# Altium PCB ESP32-S2-Ink.PcbDoc
Units mm, origin at the board's own origin, x right, y up, seen from the top; angles counter-clockwise.
Board outline 35.56 x 17.78 mm, 6 copper layers (Top Layer 1, GND 1, PWR, L4, L5, Bottom Layer 1), stack 0.816 mm thick; 51 components, 57 nets, 221 pads, 105 vias.
Unrouted connection lines stored in the file: 8.
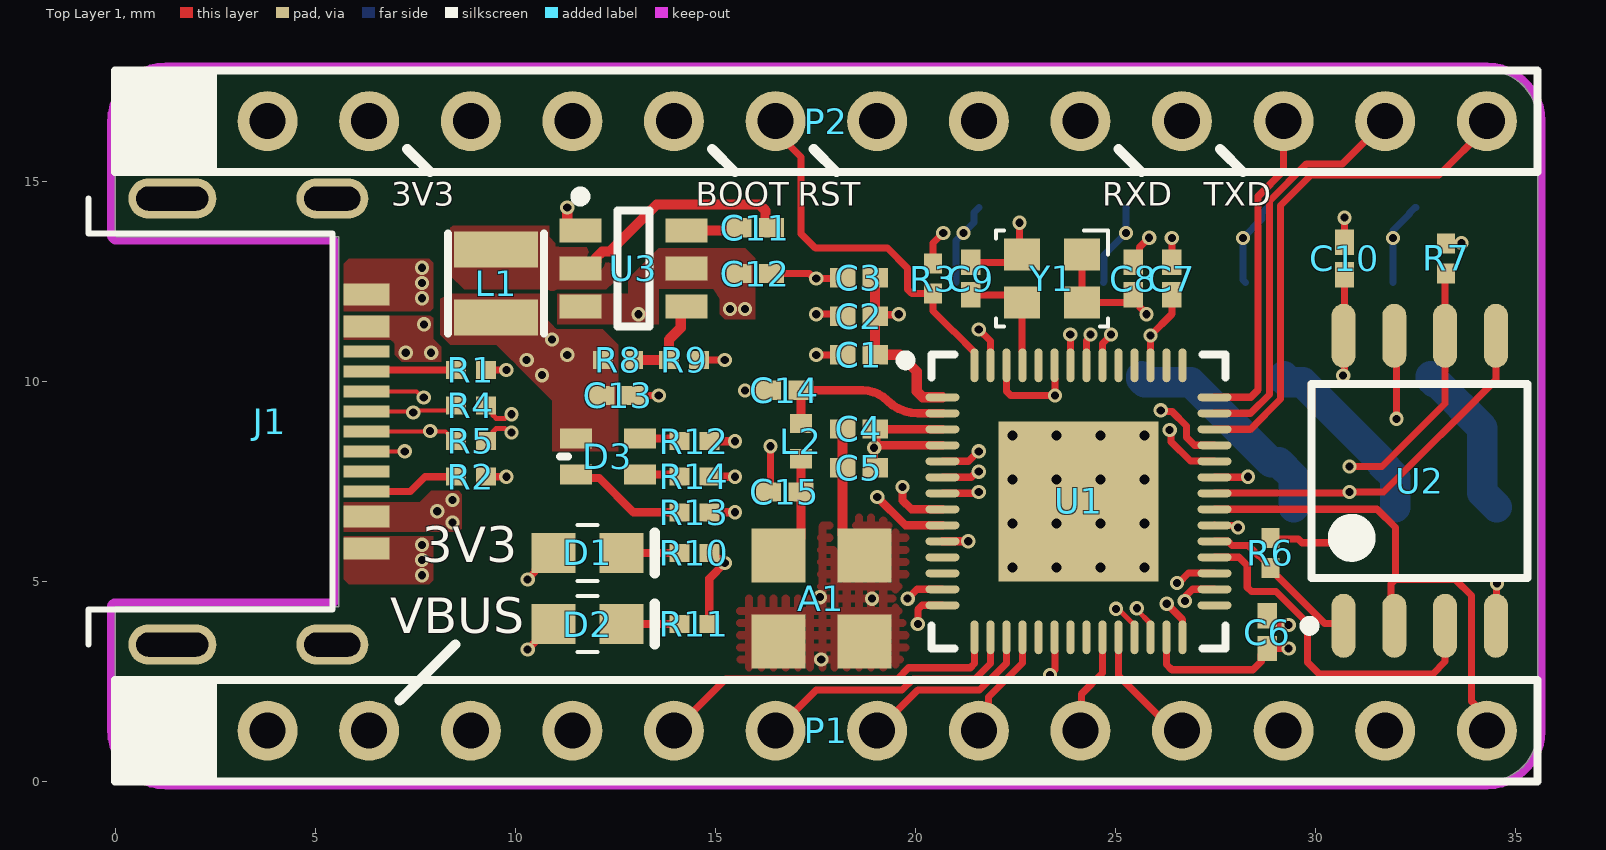
[diagram p0: Top Layer 1 view]
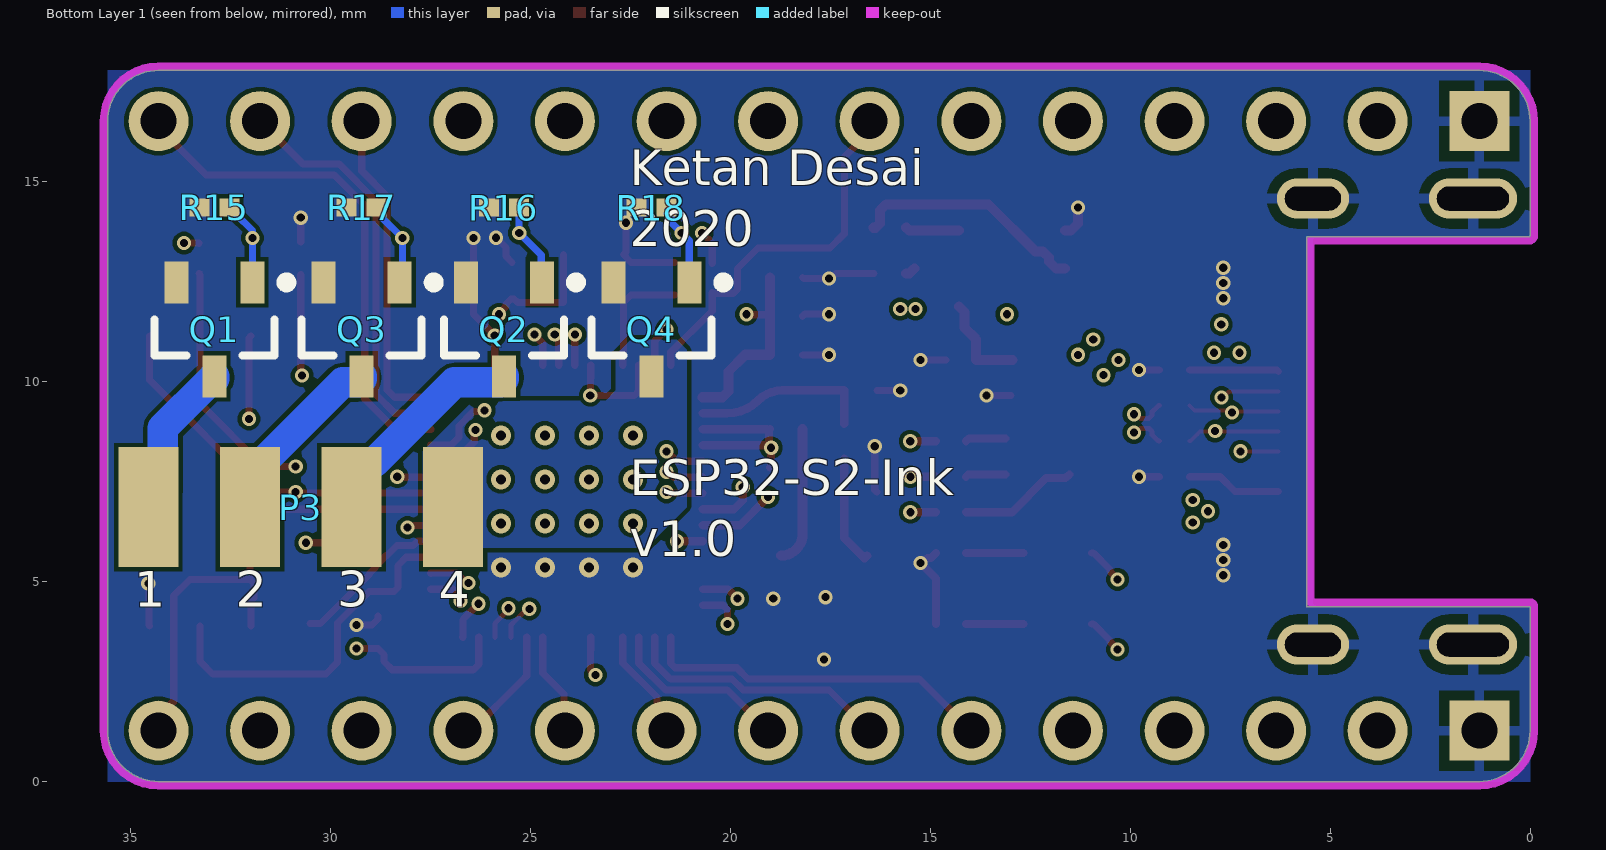
[diagram p1: Bottom Layer 1 view, seen from below]
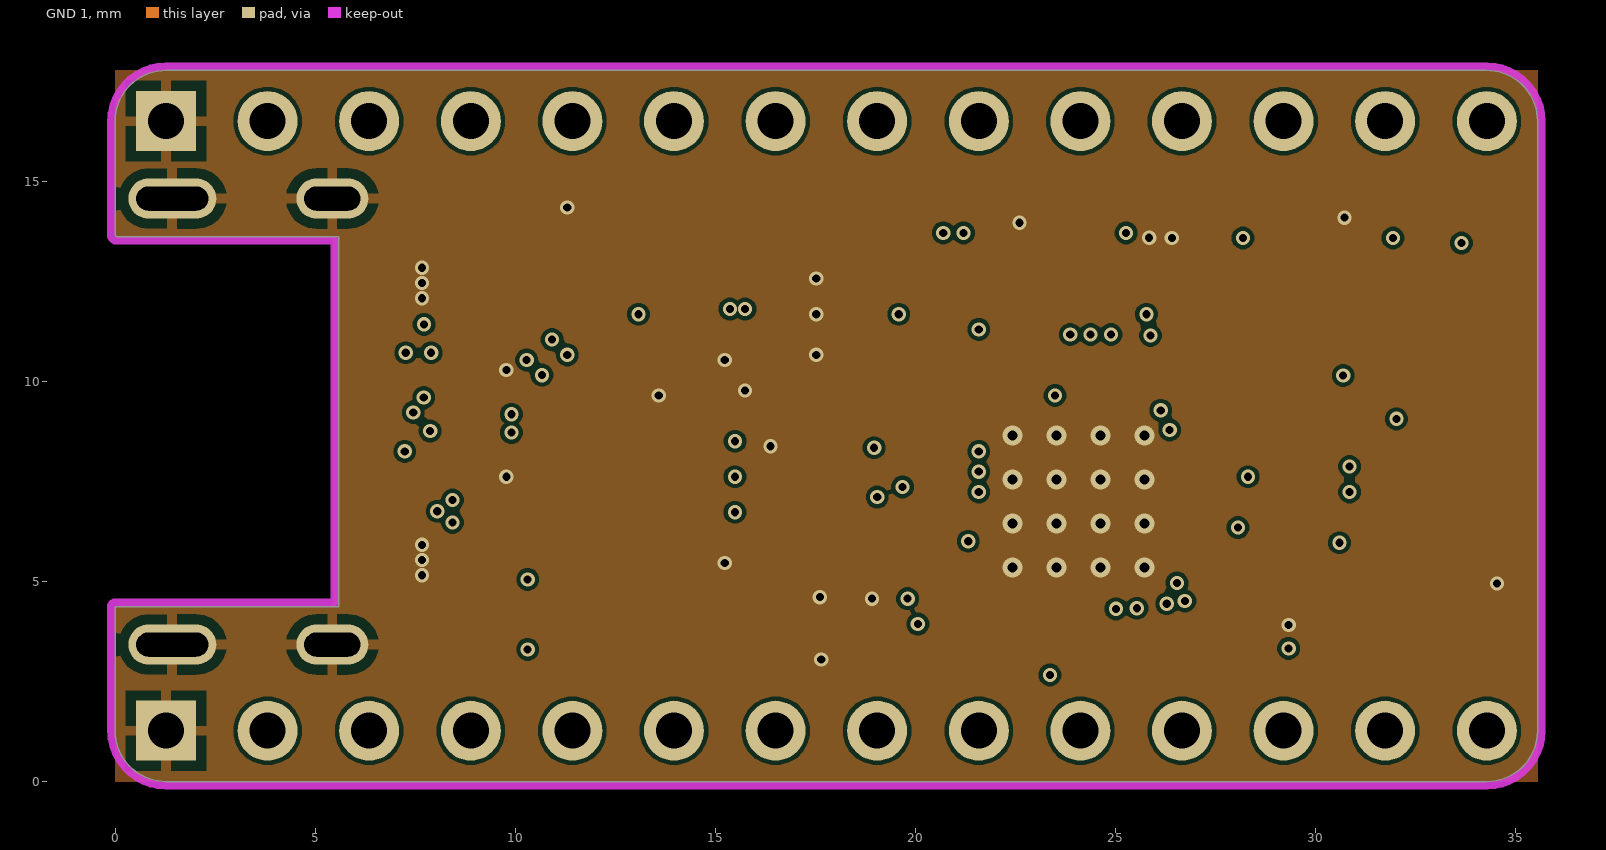
[diagram p2: GND 1]
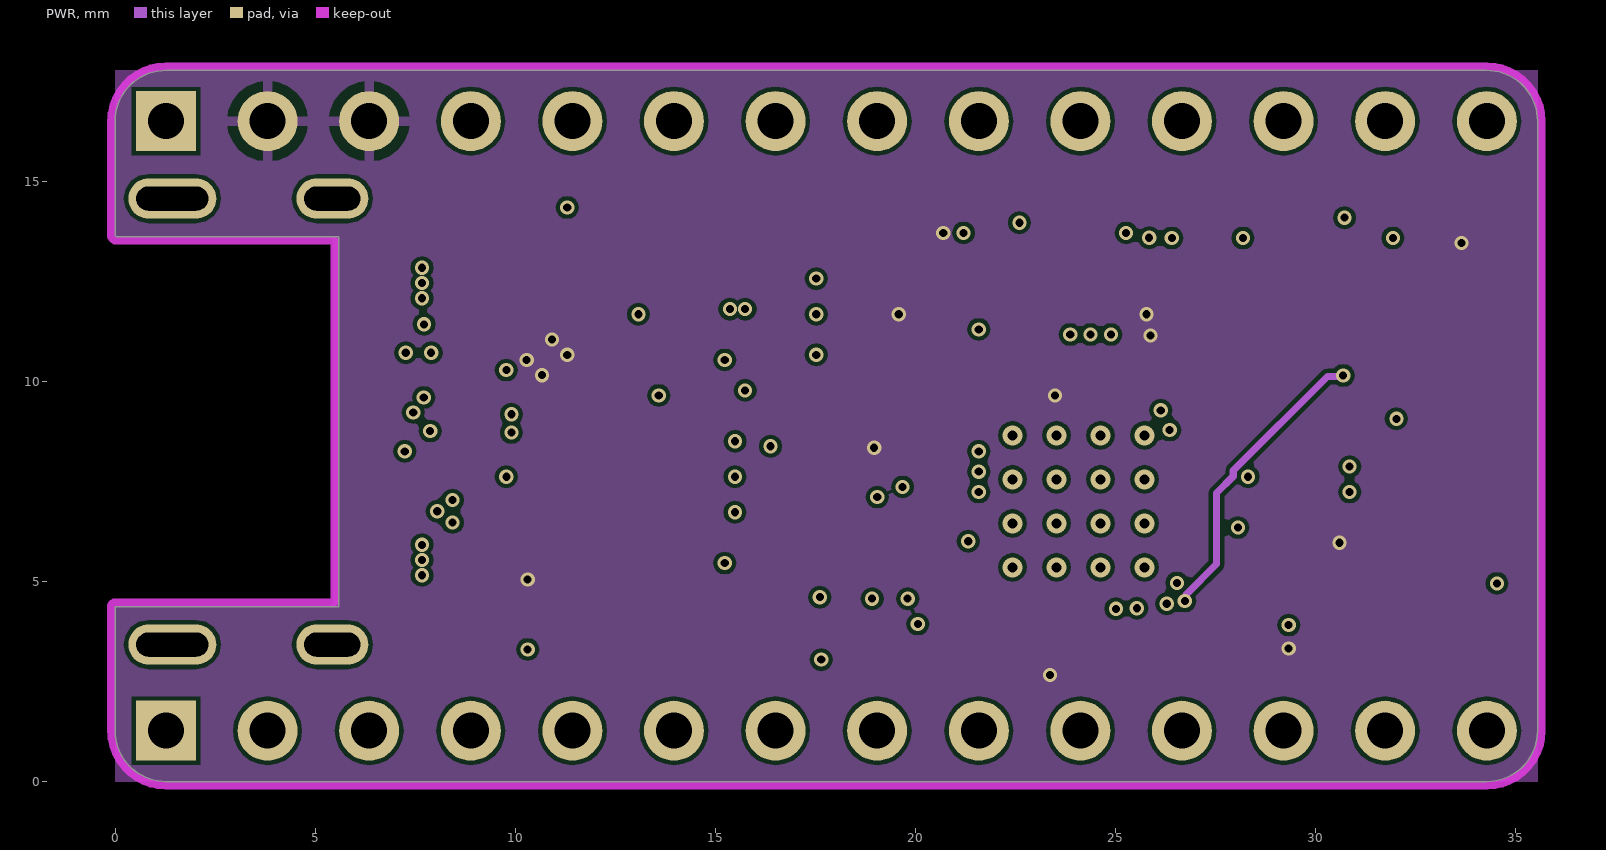
[diagram p3: PWR]
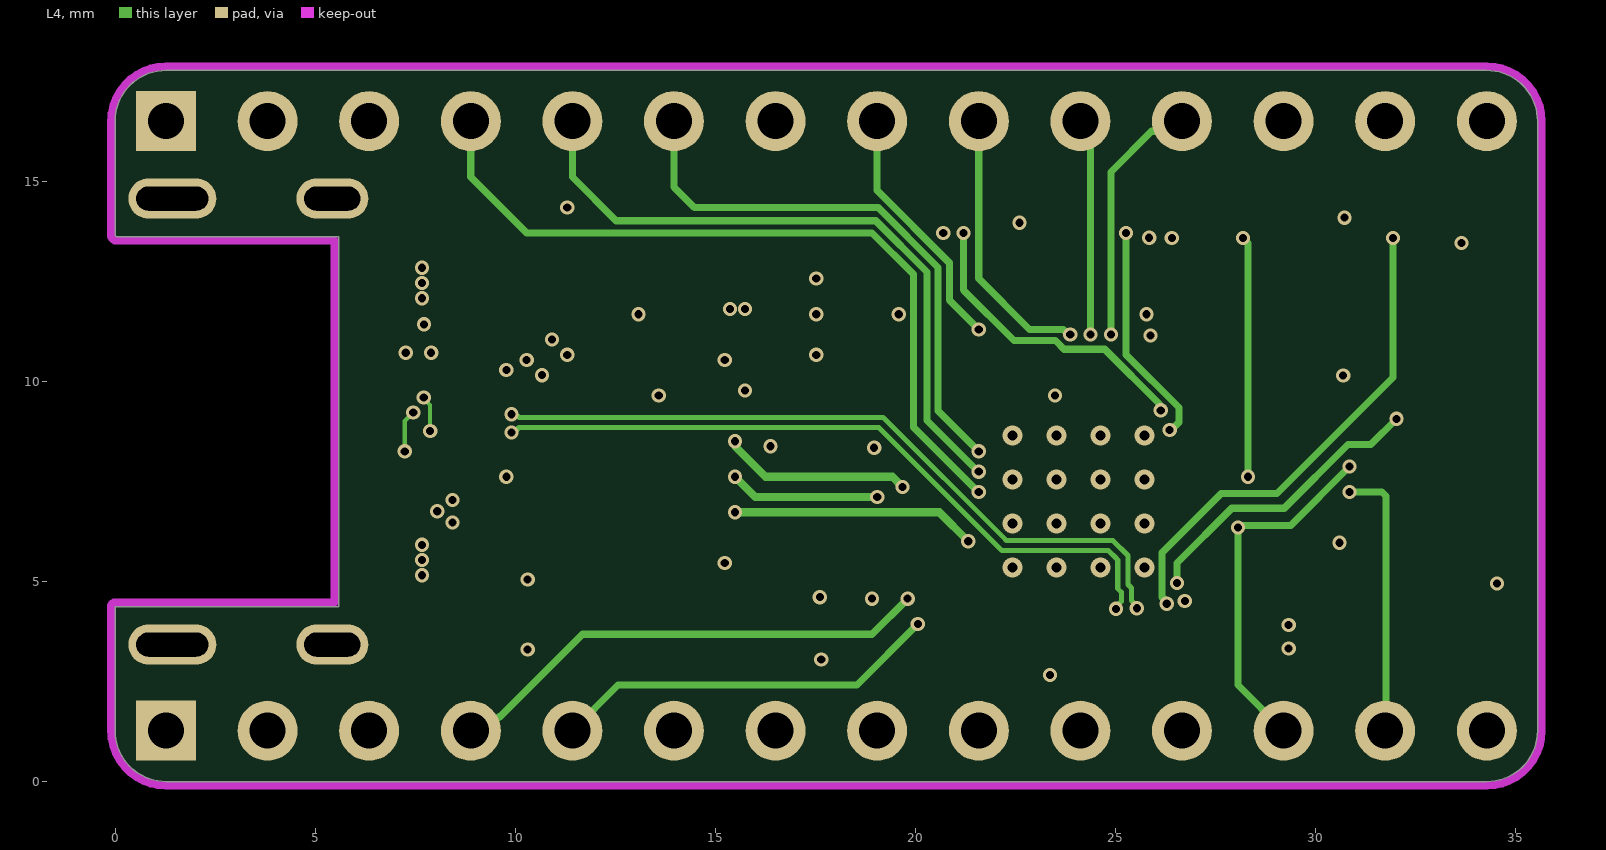
[diagram p4: L4]
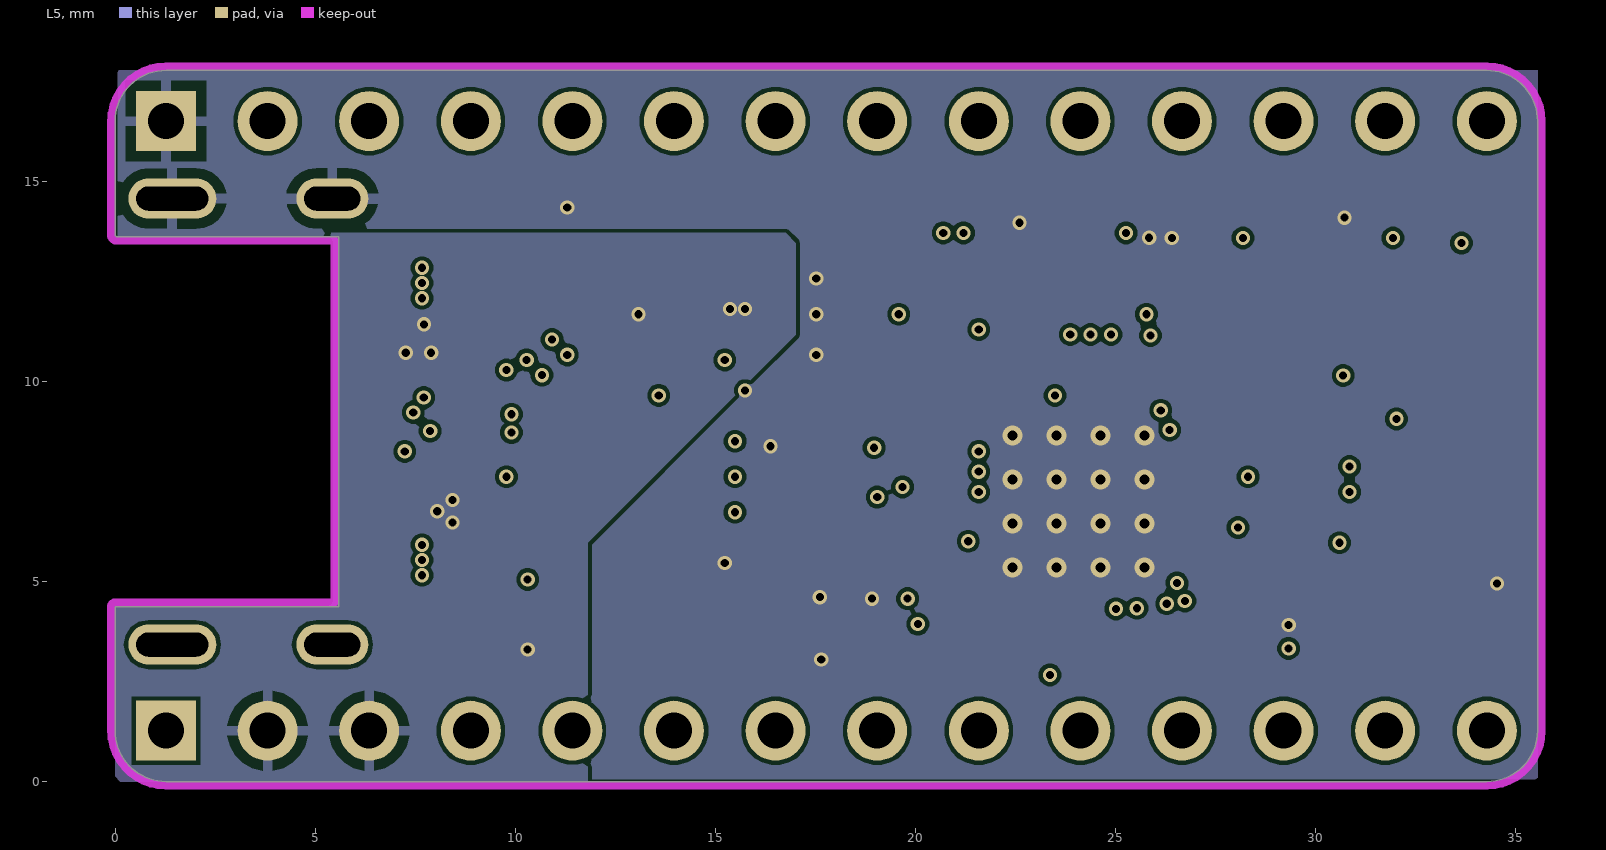
[diagram p5: L5]
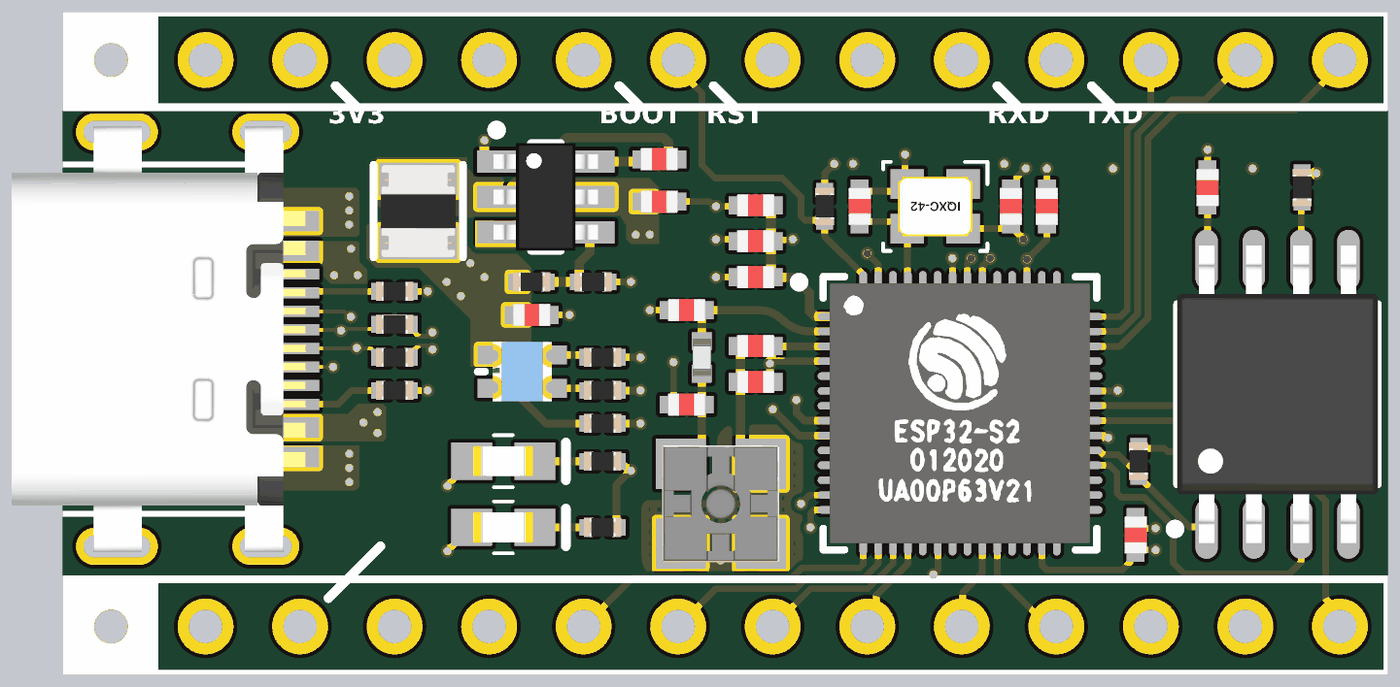
[diagram p6: 3D render of the assembled board from above, using the file's embedded part models]
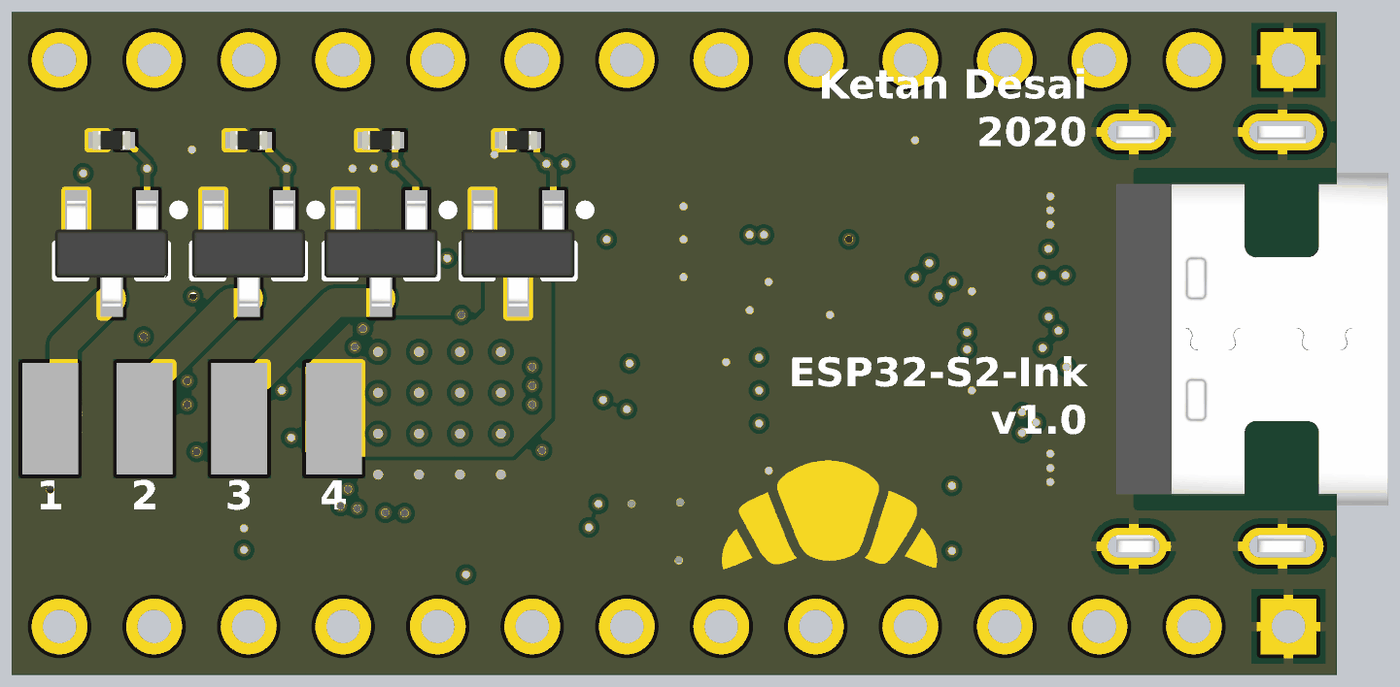
[diagram p7: 3D render of the assembled board from below, using the file's embedded part models]

## Layer stack, top to bottom
Top Solder: solder mask 0.0102, Solder Resist, Dk 3.5
Top Layer 1: signal copper 0.035
Dielectric 2: prepreg 0.0711, PP-006, Dk 4.1
GND 1: signal copper 0.035
Dielectric 3: prepreg 0.0711, PP-006, Dk 4.1
PWR: signal copper 0.0356
Dielectric 1: dielectric 0.32, FR-4, Dk 4.8
L4: signal copper 0.0356
Dielectric 4: prepreg 0.0711, PP-006, Dk 4.1
L5: signal copper 0.035
Dielectric 5: prepreg 0.0711, PP-006, Dk 4.1
Bottom Layer 1: signal copper 0.035
Bottom Solder: solder mask 0.0102, Solder Resist, Dk 3.5

## Board outline
0,16.51 cw(c1.27,16.51) 1.27,17.78 34.29,17.78 cw(c34.29,16.51) 35.56,16.51 35.56,1.27 cw(c34.29,1.27) 34.29,0 1.27,0 cw(c1.27,1.27) 0,1.27 0,4.375 5.588,4.375 5.588,13.625 0.025,13.625 0,13.65

## Design rules (kind name [scope] priority, off if disabled: settings)
Clearance [All] p1: gap=0.102 ignorepadtopadclearanceinfootprint=FALSE
DiffPairsRouting [All] p1: maxlimit=0.254 minlimit=0.127 mostfreqgap=0.127 toplayer_minwidth=0.127 toplayer_maxwidth=0.381 toplayer_prefwidth=0.127 midlayer1_minwidth=0.127 midlayer1_maxwidth=0.381 midlayer1_prefwidth=0.127 midlayer2_minwidth=0.127 midlayer2_maxwidth=0.381 midlayer2_prefwidth=0.127 midlayer3_minwidth=0.127 midlayer3_maxwidth=0.381 midlayer3_prefwidth=0.127 midlayer4_minwidth=0.127 midlayer4_maxwidth=0.381 midlayer4_prefwidth=0.127 bottomlayer_minwidth=0.127 bottomlayer_maxwidth=0.381 bottomlayer_prefwidth=0.127 maxuncoupledlength=12.7
PlaneConnect [All] p1: planeconnectstyle=Direct reliefexpansion=0.508 reliefentries=4 reliefconductorwidth=0.254 reliefairgap=0.254
PolygonConnect PolygonConnect_14 [All vs IsNamedPolygon('CH4_D_L06_P013')] p1: connectstyle=Direct reliefconductorwidth=0.254 reliefentries=4 polygonreliefangle="90 Angle" airgapwidth=0.254
PolygonConnect PolygonConnect_13 [All vs IsNamedPolygon('GND_L06_P014')] p2: thpad.connectstyle=Relief thpad.reliefconductorwidth=0.254 thpad.reliefentries=4 thpad.polygonreliefangle="90 Angle" thpad.airgapwidth=0.254 smdpad.connectstyle=Direct smdpad.reliefconductorwidth=0.254 smdpad.reliefentries=4 smdpad.polygonreliefangle="90 Angle" smdpad.airgapwidth=0.254 via.connectstyle=Direct via.reliefconductorwidth=0.254 via.reliefentries=4 via.polygonreliefangle="90 Angle" via.airgapwidth=0.254
PolygonConnect PolygonConnect_12 [All vs IsNamedPolygon('GND_L01_P012')] p3: connectstyle=Direct reliefconductorwidth=0.254 reliefentries=4 polygonreliefangle="90 Angle" airgapwidth=0.254
PolygonConnect PolygonConnect_11 [All vs IsNamedPolygon('NETC11_1_L01_P011')] p4: connectstyle=Direct reliefconductorwidth=0.254 reliefentries=4 polygonreliefangle="90 Angle" airgapwidth=0.254
PolygonConnect PolygonConnect_10 [All vs IsNamedPolygon('+3V3_L03_P000')] p5: thpad.connectstyle=Relief thpad.reliefconductorwidth=0.254 thpad.reliefentries=4 thpad.polygonreliefangle="90 Angle" thpad.airgapwidth=0.254 smdpad.connectstyle=Direct smdpad.reliefconductorwidth=0.254 smdpad.reliefentries=4 smdpad.polygonreliefangle="90 Angle" smdpad.airgapwidth=0.254 via.connectstyle=Direct via.reliefconductorwidth=0.254 via.reliefentries=4 via.polygonreliefangle="90 Angle" via.airgapwidth=0.254
PolygonConnect PolygonConnect_9 [All vs IsNamedPolygon('VBUS_L01_P010')] p6: connectstyle=Direct reliefconductorwidth=0.254 reliefentries=4 polygonreliefangle="90 Angle" airgapwidth=0.254
PolygonConnect PolygonConnect_8 [All vs IsNamedPolygon('GND_L01_P009')] p7: connectstyle=Direct reliefconductorwidth=0.254 reliefentries=4 polygonreliefangle="90 Angle" airgapwidth=0.254
PolygonConnect PolygonConnect_7 [All vs IsNamedPolygon('VBUS_L05_P003')] p8: thpad.connectstyle=Relief thpad.reliefconductorwidth=0.254 thpad.reliefentries=4 thpad.polygonreliefangle="90 Angle" thpad.airgapwidth=0.254 smdpad.connectstyle=Direct smdpad.reliefconductorwidth=0.254 smdpad.reliefentries=4 smdpad.polygonreliefangle="90 Angle" smdpad.airgapwidth=0.254 via.connectstyle=Direct via.reliefconductorwidth=0.254 via.reliefentries=4 via.polygonreliefangle="90 Angle" via.airgapwidth=0.254
PolygonConnect PolygonConnect_6 [All vs IsNamedPolygon('GND_L01_P008')] p9: connectstyle=Direct reliefconductorwidth=0.254 reliefentries=4 polygonreliefangle="90 Angle" airgapwidth=0.254
PolygonConnect PolygonConnect_5 [All vs IsNamedPolygon('VBUS_L01_P007')] p10: connectstyle=Direct reliefconductorwidth=0.254 reliefentries=4 polygonreliefangle="90 Angle" airgapwidth=0.254
PolygonConnect PolygonConnect_4 [All vs IsNamedPolygon('+3V3_L01_P006')] p11: connectstyle=Direct reliefconductorwidth=0.254 reliefentries=4 polygonreliefangle="90 Angle" airgapwidth=0.254
PolygonConnect PolygonConnect_3 [All vs IsNamedPolygon('VBUS_L01_P005')] p12: connectstyle=Direct reliefconductorwidth=0.254 reliefentries=4 polygonreliefangle="90 Angle" airgapwidth=0.254
PolygonConnect PolygonConnect_2 [All vs IsNamedPolygon('GND_L05_P004')] p13: thpad.connectstyle=Relief thpad.reliefconductorwidth=0.254 thpad.reliefentries=4 thpad.polygonreliefangle="90 Angle" thpad.airgapwidth=0.254 smdpad.connectstyle=Direct smdpad.reliefconductorwidth=0.254 smdpad.reliefentries=4 smdpad.polygonreliefangle="90 Angle" smdpad.airgapwidth=0.254 via.connectstyle=Direct via.reliefconductorwidth=0.254 via.reliefentries=4 via.polygonreliefangle="90 Angle" via.airgapwidth=0.254
PolygonConnect PolygonConnect_1 [All vs IsNamedPolygon('GND_L02_P002')] p14: thpad.connectstyle=Relief thpad.reliefconductorwidth=0.254 thpad.reliefentries=4 thpad.polygonreliefangle="90 Angle" thpad.airgapwidth=0.254 smdpad.connectstyle=Direct smdpad.reliefconductorwidth=0.254 smdpad.reliefentries=4 smdpad.polygonreliefangle="90 Angle" smdpad.airgapwidth=0.254 via.connectstyle=Direct via.reliefconductorwidth=0.254 via.reliefentries=4 via.polygonreliefangle="90 Angle" via.airgapwidth=0.254
PolygonConnect [All] p15: connectstyle=Relief reliefconductorwidth=0.254 reliefentries=4 polygonreliefangle="90 Angle" airgapwidth=0.254
RoutingVias [All] p1: holewidth=0.203 width=0.356 viastyle="Through Hole" minholewidth=0.203 minwidth=0.254 maxholewidth=0.711 maxwidth=1.27
SolderMaskExpansion [All] p1: expansion=0.102 istentingtop=FALSE
Width [All] p1: maxlimit=0.762 minlimit=0.102 preferedwidth=0.178
28 further rules are at their usual default settings.

## Classes and differential pairs
differential pair USB: +USB_P -USB_N

## Components (designator, comment, footprint, x,y, rotation, side; value= is the part's Value field where it differs from the comment)
A1 "0479480001" 0479480001 17.653,4.572 r180 top
C1 "C0402 10uF 10V" C0402-HIGH-DENSITY 18.593,10.668 r0 top value=10uF
C2 "C0402 100nF 10V X5R" C0402-HIGH-DENSITY 18.593,11.633 r0 top value=100nF
C3 "C0402 100nF 10V X5R" C0402-HIGH-DENSITY 18.593,12.598 r0 top value=100nF
C4 "C0402 10uF 10V" C0402-HIGH-DENSITY 18.593,8.814 r0 top value=10uF
C5 "C0402 100nF 10V X5R" C0402-HIGH-DENSITY 18.593,7.849 r0 top value=100nF
C6 "C0402 10uF 10V" C0402-HIGH-DENSITY 28.804,3.734 r270 top value=10uF
C7 "C0402 100nF 10V X5R" C0402-HIGH-DENSITY 26.416,12.573 r270 top value=100nF
C8 "C0402 100nF 10V X5R" C0402-HIGH-DENSITY 25.451,12.573 r270 top value=100nF
C9 "C0402 15pF 50V C0G" C0402-HIGH-DENSITY 21.387,12.573 r270 top value=15pF
C10 "C0402 100nF 10V X5R" C0402-HIGH-DENSITY 30.734,13.081 r270 top value=100nF
C11 "C0402 100nF 10V X5R" C0402-HIGH-DENSITY 16.002,13.843 r180 top value=100nF
C12 "C0402 10uF 10V" C0402-HIGH-DENSITY 16.002,12.7 r180 top value=10uF
C13 "C0402 10uF 10V" C0402-HIGH-DENSITY 12.573,9.652 r180 top value=10uF
C14 "0402 Capacitor Template" C0402-HIGH-DENSITY 16.739,9.779 r0 top value=??nF
C15 "0402 Capacitor Template" C0402-HIGH-DENSITY 16.739,7.239 r0 top value=??nF
D1 "3V3" LED0603-IPC 11.811,5.715 r180 top
D2 "VBUS" LED0603-IPC 11.811,3.937 r180 top
D3 "RGB" LED_0606_RGB_WURTH 12.319,8.128 r0 top
J1 "16 Pin Mid Mount USB C" "USB-C - 16 Pin Mid Mount" 3.429,9 r270 top
L1 "SDEM25201B-2R2MS" L1008 9.525,12.446 r270 top value=2.2uH
L2 "! Inductor Template" L0402-Murata-WW-High-Density 17.145,8.509 r270 top value=??H
P1 "Header 14" HDR1X14 1.27,1.27 r0 top locked
P2 "Header 14" HDR1X14 1.27,16.51 r0 top locked
P3 "Header 1x4" "HEADER 1X4 SMD 2.54mm" 34.544,6.858 r180 bottom
Q1 "DMN2056U" SOT23-DMN2056 32.893,11.303 r270 bottom
Q2 "DMN2056U" SOT23-DMN2056 25.654,11.303 r270 bottom
Q3 "DMN2056U" SOT23-DMN2056 29.21,11.303 r270 bottom
Q4 "DMN2056U" SOT23-DMN2056 21.971,11.303 r270 bottom
R1 "R0402 5.1K 1%" R0402-HIGH-DENSITY 8.89,10.287 r0 top value=5.1k
R2 "R0402 5.1K 1%" R0402-HIGH-DENSITY 8.89,7.62 r0 top value=5.1k
R3 "R0402 10k 1%" R0402-HIGH-DENSITY 20.447,12.573 r270 top value=10k
R4 "R0402 100R 1%" R0402-HIGH-DENSITY 8.89,9.398 r0 top value=100
R5 "R0402 100R 1%" R0402-HIGH-DENSITY 8.89,8.509 r0 top value=100
R6 "R0402 10k 1%" R0402-HIGH-DENSITY 28.88,5.715 r270 top value=10k
R7 "R0402 10k 1%" R0402-HIGH-DENSITY 33.274,13.081 r270 top value=10k
R8 "R0402 33k 1%" R0402-HIGH-DENSITY 12.573,10.541 r180 top value=33k
R9 "R0402 10k 1%" R0402-HIGH-DENSITY 14.224,10.541 r180 top value=10k
R10 "R0402 1k 1%" R0402-HIGH-DENSITY 14.478,5.715 r180 top value=1k
R11 "R0402 1k 1%" R0402-HIGH-DENSITY 14.478,3.937 r180 top value=1k
R12 "R0402 1k 1%" R0402-HIGH-DENSITY 14.478,8.509 r180 top value=1k
R13 "R0402 1k 1%" R0402-HIGH-DENSITY 14.478,6.731 r180 top value=1k
R14 "R0402 1k 1%" R0402-HIGH-DENSITY 14.478,7.62 r180 top value=1k
R15 "R0402 10k 1%" R0402-HIGH-DENSITY 32.893,14.351 r180 bottom value=10k
R16 "R0402 10k 1%" R0402-HIGH-DENSITY 25.654,14.351 r180 bottom value=10k
R17 "R0402 10k 1%" R0402-HIGH-DENSITY 29.21,14.351 r180 bottom value=10k
R18 "R0402 10k 1%" R0402-HIGH-DENSITY 21.971,14.351 r180 bottom value=10k
U1 "ESP32-S2" QFN56 24.083,7.007 r0 top locked
U2 "MT25QL128ABA1ESE" SOIC127P800X216-8N 32.614,7.518 r90 top locked
U3 "TPS564201" SOT95P280X90-6N 12.954,12.827 r0 top
Y1 "40MHz" SiT8008B 23.419,12.573 r180 top

## Footprints (in the part's own frame and the unit in brackets; to place one, negate y for a bottom-side part, rotate by r counter-clockwise, add the part's x,y. Pads: shape width x height; smd on the part's side, far side on the other; paste and mask are expansions set on the pad)
0479480001 [mm] "Molex 0479480001 2.4GHz Chip Antenna"
  rect 1.35x1.35 smd: 1(1.075,-1.075) 2(-1.075,1.075) 2(-1.075,-1.075) 2(1.075,1.075)
  body extent -1.58,-1.58 1.58,1.58, height 4
C0402-HIGH-DENSITY [mil] "Chip Capacitor, 2-Leads, Body 1.02x0.51mm, IPC High Density"
  rect 25x19 smd: 1(-16,0) 2(16,0)
  body extent -20,-12 20,12, height 8
HDR1X14 [mm] "Connector; Header; 14 Position"
  rect 1.5x1.5 hole 0.9: 1(0,0)
  round 1.5 hole 0.9: 2(2.54,0) 3(5.08,0) 4(7.62,0) 5(10.16,0) 6(12.7,0) 7(15.24,0) 8(17.78,0) 9(20.32,0) 10(22.86,0) 11(25.4,0) 12(27.94,0) 13(30.48,0) 14(33.02,0)
  silkscreen extent -1.27,-1.27 34.29,1.27
"HEADER 1X4 SMD 2.54mm" [mm] "Connector; Header; 4 Position"
  rect 1.5x3 smd: 1(0,0) 2(2.54,0) 3(5.08,0) 4(7.62,0)
L0402-Murata-WW-High-Density [mm] "Chip Inductor, 2-Leads, Body 1.00x0.50mm, IPC High Density"
  rect 0.48x0.54 smd: 1(-0.44,0) 2(0.44,0)
  body extent -0.5,-0.25 0.5,0.25, height 0.5
L1008 [mm] "Cyntec SDEM25201B"
  rect 0.9x2.1 smd: 1(-0.85,0) 2(0.85,0)
  silkscreen extent -1.25,-1.2 1.25,1.2, body extent -1.25,-1 1.25,1, height 1.23
LED0603-IPC [mm]
  rect 1.1x1 smd: A(0.85,0) K(-0.85,0)
  silkscreen extent -1.68,-0.7 0.25,0.7, body extent -0.8,-0.4 0.8,0.4, height 1.1
LED_0606_RGB_WURTH [mm] "Chip; Body 1.6 x 1.6 mm (LxW typ) WURTH"
  rect 0.8x0.5 smd: A(-0.8,0.45) BK(-0.8,-0.45) GK(0.8,-0.45) RK(0.8,0.45)
  silkscreen extent -1.2,0 -1,0, body extent -0.8,-0.8 0.8,0.8, height 0.4
QFN56 [mm] "QFN, 56-Leads, Body 7.00x7.00mm, Pitch 0.40mm, Thermal Pad 4.00x4.00mm, IPC Medium Density"
  oval 0.85x0.2 smd: 1(-3.4,2.6) 2(-3.4,2.2) 3(-3.4,1.8) 4(-3.4,1.4) 5(-3.4,1) 6(-3.4,0.6) 7(-3.4,0.2) 8(-3.4,-0.2) 9(-3.4,-0.6) 10(-3.4,-1) 11(-3.4,-1.4) 12(-3.4,-1.8) 13(-3.4,-2.2) 14(-3.4,-2.6) 29(3.4,-2.6) 30(3.4,-2.2) 31(3.4,-1.8) 32(3.4,-1.4) 33(3.4,-1) 34(3.4,-0.6) 35(3.4,-0.2) 36(3.4,0.2) 37(3.4,0.6) 38(3.4,1) 39(3.4,1.4) 40(3.4,1.8) 41(3.4,2.2) 42(3.4,2.6)
  oval 0.2x0.85 smd: 15(-2.6,-3.4) 16(-2.2,-3.4) 17(-1.8,-3.4) 18(-1.4,-3.4) 19(-1,-3.4) 20(-0.6,-3.4) 21(-0.2,-3.4) 22(0.2,-3.4) 23(0.6,-3.4) 24(1,-3.4) 25(1.4,-3.4) 26(1.8,-3.4) 27(2.2,-3.4) 28(2.6,-3.4) 43(2.6,3.4) 44(2.2,3.4) 45(1.8,3.4) 46(1.4,3.4) 47(1,3.4) 48(0.6,3.4) 49(0.2,3.4) 50(-0.2,3.4) 51(-0.6,3.4) 52(-1,3.4) 53(-1.4,3.4) 54(-1.8,3.4) 55(-2.2,3.4) 56(-2.6,3.4)
  rect 4x4 smd: 57(0,0)
  silkscreen extent -4.45,-3.67 3.67,3.68, body extent -3.5,-3.5 3.5,3.5, height 0.85
R0402-HIGH-DENSITY [mm] "Chip Resistor, 2-Leads, Body 1.00x0.50mm, IPC High Density"
  rect 0.5x0.45 smd: 1(-0.375,0) 2(0.375,0)
  body extent -0.5,-0.25 0.5,0.26, height 0.34
SiT8008B [mm] "2.0 x 1.6 x 0.75 mm"
  rect 0.9x0.8 smd: 1(-0.75,-0.6) 2(0.75,-0.6) 3(0.75,0.6) 4(-0.75,0.6)
  silkscreen extent -1.4,-1.2 1.4,1.2, body extent -1,-0.8 1,0.8, height 0.51
SOIC127P800X216-8N [mm] "SOIC, 8-Leads, Body 5.28x5.28mm, Pitch 1.27mm, IPC Medium Density"
  oval 1.6x0.6 smd: 1(-3.625,1.905) 2(-3.625,0.635) 3(-3.625,-0.635) 4(-3.625,-1.905) 5(3.625,-1.905) 6(3.625,-0.635) 7(3.625,0.635) 8(3.625,1.905)
  silkscreen extent -3.75,-2.7 2.43,2.88, body extent -4,-2.7 4,2.7, height 2.16
SOT23-DMN2056 [mm] "SOT23, 3-Leads: 1=G, 2=S, 3=D Body 2.92x2.37mm, Pitch 0.95mm, IPC Medium Density"
  rect 1.05x0.6 smd: 1(-1.175,0.95) 2(-1.175,-0.95) 3(1.175,0)
  silkscreen extent -1.3,-1.5 0.65,1.92, body extent -1.42,-1.52 1.42,1.52, height 1.11
SOT95P280X90-6N [mm] "SOT23, 6-Leads, Body 2.90x2.80mm, Pitch 0.95mm, IPC Medium Density"
  rect 1.05x0.6 smd: 1(-1.325,0.95) 2(-1.325,0) 3(-1.325,-0.95) 4(1.325,-0.95) 5(1.325,0) 6(1.325,0.95)
  silkscreen extent -1.45,-1.45 0.4,1.92, body extent -1.4,-1.45 1.4,1.45, height 1.45
"USB-C - 16 Pin Mid Mount" [mm] "16 Pin USB C Mid Mount"
  rect 0.3x1.15 smd: A1(-3.3,2.86) A4(-2.5,2.86) A5(-1.25,2.86) A6(-0.25,2.86) A7(0.25,2.86) A8(1.25,2.86) A9(2.5,2.86) A12(3.3,2.86) B1(3.05,2.86) B4(2.25,2.86) B5(1.75,2.86) B6(0.75,2.86) B7(-0.75,2.86) B8(-1.75,2.86) B9(-2.25,2.86) B12(-3.05,2.86)
  oval 1x1.8 hole 0.6 slot 1.4 at 90 deg: S1(-5.575,2) S2(5.575,2)
  oval 1x2.2 hole 0.6 slot 1.8 at 90 deg: S3(-5.575,-2) S4(5.575,-2)
  silkscreen extent -5.58,-4.1 5.58,2, body extent -5.73,-4.83 5.72,3.07, height 1.82

## Part data
A1: library part "Molex 0479480001", "2.4GHz Bluetooth, WLAN, Zigbee™ Chip RF Antenna 2.4GHz ~ 2.483.5GHz 3dBi Solder Surface Mount", Supplier Part Number 1=WM4893CT-ND, Supplier 1=Digi-Key, Supplier 2=Mouser, Supplier Part Number 2=538-47948-0001
C1 C4 C6 C12 C13: "Chip Capacitor, 0402, 10uF, 10V, X5R", Max. Voltage=10V, Supplier Part Number 1=1276-1450-2-ND, EIA Code=X5R, Supplier 1=Digi-Key
C2 C3 C5 C7 C8 C10 C11: "Chip Capacitor, 0402, 100nF, 10V, X5R", Max. Voltage=10V, Supplier Part Number 1=311-1336-1-ND, EIA Code=X5R, Supplier 1=Digi-Key
C9: library part "C0402 16pF 50V C0G", "Chip Capacitor, 0402, 15pF, 50V, C0G", Max. Voltage=50V, Supplier Part Number 1=490-5926-1-ND, EIA Code=C0G, Supplier 1=Digi-Key
C14 C15: "Chip Capacitor, 0402, ??nF, 10V, X7R", Max. Voltage=10V, EIA Code=X7R
D1 D2: library part "LED 0603 Yellow", "LED YELLOW CLEAR 0603 SMD", Supplier Part Number 1=732-4981-1-ND, Supplier 1=Digi-Key
D3: library part Led_RGB_0606, "RGB Led 1.6 x 1.6 mm Diffused", Manufacturer=Everlight, Manufacturer Part Number=19-237/R6GHBHW-C01/2T, Supplier Part Number 1=1080-1590-1-ND, Supplier 1=Digi-Key
J1: library part "USB C USB 2.0 and PD", "USB-C USB 2.0 5A PD 16 Position Mid Mount", Manufacturer="Jing Extension of the Electronic Co", Supplier Part Number 1=C168688, Supplier 1=LCSC
L1: "2.2µH Shielded Inductor 2.05A 117mOhm Max 1008 (2520 Metric)", Supplier Part Number 1=2037-SDEM25201B-2R2MSCT-ND, Supplier 1=Digi-Key
L2: "Inductor, ??uH"
P1 P2: "Header, 14-Pin", LatestRevisionDate=17-Jul-2002, LatestRevisionNote="Re-released for DXP Platform.", Publisher="Altium Limited"
P3: "Header, 4-Pin", LatestRevisionDate=17-Jul-2002, LatestRevisionNote="Re-released for DXP Platform.", Publisher="Altium Limited"
Q1 Q2 Q3 Q4: "MOSFET N-Ch -20V VDSS Enchanced Mosfet 4.2A", Supplier Part Number 1=DMN2056U-7DICT-ND, Supplier 1=Digi-Key
R1 R2: "RES SMD 5.1K OHM 1% 1/10W 0402", Operating Temperature="-55°C ~ 155°C", Temperature Coefficient=±100ppm/°C, Features="Automotive AEC-Q200"
R3 R6 R7 R9 R15 R16 R17 R18: "Chip Resistor, 0402, 10k ohms, 1%, 1/16 W", Supplier Part Number 1=311-10.0KLRCT-ND, Supplier 1=Digi-Key
R4 R5: "Chip Resistor, 0402, 100 ohms, 1%, 1/16 W", Supplier Part Number 1=311-100LRCT-ND, Supplier 1=Digi-Key
R8: "Chip Resistor, 0402, 33k ohms, 1%, 1/16 W", Supplier Part Number 1=311-33.0KLRCT-ND, Supplier 1=Digi-Key
R10 R11 R12 R13 R14: "Chip Resistor, 0402, 1k ohms, 1%, 1/16 W", Supplier Part Number 1=311-1.00KLRCT-ND, Supplier 1=Digi-Key
U1: "WiFi 802.11b/g/n Transceiver Module 2.4GHz QFN-56", Supplier Part Number 1=1965-ESP32-S2CT-ND, Supplier 1=Digi-Key, Supplier 2=Mouser, Supplier 3=LCSC, Supplier Part Number 2=356-ESP32-S2, Supplier Part Number 3=C529594
U2: "SPI Flash, 128Mb, 3V", Supplier Part Number 1=340-224871-TRAY, Supplier 1=Mouser
U3: "Buck Converter, 4.5-17V in, 0.76-7V out, 4A, TSOT-6", Manufacturer="Texas Instruments", Supplier Part Number=296-44195-1-ND, Last Modified By="Peter Kazakoff", Last Modified Date="November 13th 2016", Manufacturer Part Number=TPS564201, Supplier=Digi-Key, Supplier 1=Digi-Key, Supplier Part Number 1=296-44195-1-ND
Y1: library part "40MHZ CMOS ±10ppm", "OSC MEMS 40.0000MHZ 1.8-3.3V 2016 SMD 15pF Load", Current - Supply (Max)=4.5mA, Frequency Stability=±10ppm, Operating Temperature="-40°C ~ 85°C", Output=CMOS, Supplier 3=LCSC, Supplier Part Number 3=C669085

## Via types
v1: diameter 0.356, hole 0.203, Top Layer 1 to Bottom Layer 1, tented both sides, 89 vias
v2: diameter 0.5, hole 0.25, Top Layer 1 to Bottom Layer 1, tented both sides, 16 vias

## Nets (pads, with @x,y where several pads share a name; then routed paths per layer and width w, separated by ;. In a path a pad name is that pad's centre, name@x,y a point inside that pad or via, vN(x,y) a via of type N, cw(c..) or ccw(c..) an arc to the next point about the centre after c; other vN are vias at no path point)
+3V3: C1.2 C2.2 C3.2 C4.2 C5.2 C6.2 C7.2 C8.2 C13.2 D1.A D3.A L1.2 P2.2 P2.3 R3.1 R6.1 R7.1 R8.2 U1.1 U1.3 U1.4 U1.20 U1.27 U1.45 U1.51 U1.54 Y1.1 Y1.4 | length 26
  Top Layer 1 w0.178: v1(10.312,5.055) 10.312,5.066 10.5,5.254 10.5,5.304 10.911,5.715 D1.A ; C2.2 19.035,11.669 19.574,11.669 v1(19.59,11.684) ; R3.1 20.447,13.462 v1(20.701,13.716) ; U1.54 22.283,9.756 22.387,9.652 v1(23.495,9.652) 23.495,10.064 23.483,10.076 U1.51 ; v1(23.368,2.667) 23.495,2.794 23.495,3.264 23.483,3.276 U1.20 ; Y1.1 Y1.4 25.308,11.973 25.4,12.065 25.476,12.065 25.603,11.938 25.603,11.877 25.781,11.699 v1(25.781,11.684) ; U1.45 v1(25.883,11.151) 26.416,11.684 C7.2 ; U1.27 26.283,2.927 26.416,2.794 28.448,2.794 28.651,2.997 28.651,3.175 C6.2 v1(29.337,3.327) ; R6.1 28.909,6.061 29.578,6.061 29.67,5.969 v1(30.607,5.969) ; R7.1 33.277,13.459 33.652,13.459 v1(33.655,13.462)
  Top Layer 1 w0.203: v1@18.974,8.407 v1(18.974,8.345) 18.974,7.874 C5.2 ; C4.2 19.025,8.788 19.025,8.407 U1.4 ; C4.2@19.094,8.807 U1.3
  Top Layer 1 w0.254: C3.2 C2.2 C1.2 19.622,10.668 20.041,10.249 20.041,9.756 20.189,9.607 U1.1
  other v1: 10.668,10.16 10.287,10.541 11.303,10.668 10.922,11.049
CH1_D: P3.1 Q1.3 | length 4
  Bottom Layer 1 w0.762: Q1.3 32.893,10.065 32.974,9.984 33.037,9.984 34.182,8.839 34.182,7.22 P3.1
CH1_G: Q1.1 R15.2 U1.28 | length 15.5
  Top Layer 1 w0.178: v1(26.289,4.445) 26.679,4.055 26.679,3.611 U1.28
  L4 w0.178: v1(26.289,4.445) 26.289,4.493 26.175,4.607 26.175,5.728 27.651,7.204 29.048,7.204 31.943,10.099 v1(31.943,13.589)
  Bottom Layer 1 w0.178: Q1.1 v1(31.943,13.589) 31.943,13.776 32.357,14.19 32.357,14.215 32.493,14.351 R15.2
CH2_D: P3.2 Q3.3 | length 4.7
  Bottom Layer 1 w0.762: Q3.3 29.21,10.065 29.291,9.984 29.685,9.984 31.135,8.534 31.635,8.034 31.635,7.977 32.004,7.608 P3.2
CH2_G: Q3.1 R17.2 U1.37 | length 9
  Top Layer 1 w0.178: U1.37 28.308,7.607 v1(28.321,7.62)
  L4 w0.178: v1(28.194,13.589) 28.321,13.462 v1(28.321,7.62)
  Bottom Layer 1 w0.178: Q3.1 28.194,12.544 v1(28.194,13.589) 28.674,14.069 28.674,14.215 28.81,14.351 R17.2
CH3_D: P3.3 Q2.3 | length 5.6
  Bottom Layer 1 w0.762: Q2.3 25.654,10.065 25.735,9.984 26.891,9.984 28.898,7.977 29.095,7.977 29.464,7.608 P3.3
CH3_G: Q2.1 R16.2 U1.38 | length 9.3
  Top Layer 1 w0.178: v1(26.362,8.789) 26.396,8.755 26.396,8.494 26.879,8.011 27.479,8.011 U1.38
  L4 w0.178: v1(25.273,13.716) 25.273,10.668 26.593,9.348 26.593,8.982 26.4,8.789 v1(26.362,8.789)
  Bottom Layer 1 w0.178: Q2.1 24.723,12.497 24.723,13.166 v1(25.273,13.716) 25.273,14.345 R16.2
CH4_D: P3.4 Q4.3
CH4_G: Q4.1 R18.2 U1.39 | length 11.7
  Top Layer 1 w0.178: v1(26.14,9.281) 26.174,9.247 26.425,9.247 26.781,8.891 26.781,8.606 26.98,8.407 U1.39
  L4 w0.178: v1(21.209,13.716) 21.209,12.284 22.469,11.024 23.508,11.024 23.723,10.808 24.738,10.808 26.106,9.44 26.106,9.315 v1(26.14,9.281)
  Bottom Layer 1 w0.178: Q4.1 21.021,13.523 21.209,13.711 v1(21.209,13.716) 21.472,13.979 21.472,14.227 R18.2
DAC_1: P1.10 U1.23 | length 2.6
  Top Layer 1 w0.178: P1.10 24.154,1.294 24.154,2.183 24.683,2.712 U1.23
DAC_2: P1.11 U1.24 | length 3.1
  Top Layer 1 w0.178: U1.24 25.083,2.644 25.187,2.54 26.457,1.27 P1.11
GND: A1.2 C1.1 C2.1 C3.1 C4.1 C5.1 C6.1 C7.1 C8.1 C9.1 C10.1 C12.1 C13.1 C14.1 C15.1 J1.A1 J1.A12 J1.B1 J1.B12 J1.S1 J1.S2 J1.S3 J1.S4 P1.1 P2.1 Q1.2 Q2.2 Q3.2 Q4.2 R1.2 R2.2 R9.1 R10.1 R11.1 R15.1 R16.1 R17.1 R18.1 U1.57 U2.4 U3.1 Y1.2 | length 19.6
  Top Layer 1 w0.178: R2.2 v1(9.779,7.62) ; R1.2 v1(9.779,10.287) ; C13.1 v1(13.589,9.652) ; R9.1 v1(15.24,10.541) ; v1(15.748,9.779) C14.1 ; C15.1 16.383,7.29 v1(16.383,8.382) ; C12.1 17.351,12.7 17.478,12.573 v1(17.526,12.573) 18.161,12.573 C3.1 ; v1(17.526,10.668) C1.1 ; v1(17.526,11.684) 18.136,11.684 C2.1 ; C9.1 22.475,12.979 Y1.2 22.606,13.236 v1(22.606,13.97) ; C8.1 25.603,13.132 25.603,13.348 v1(25.849,13.594) ; C7.1 v1(26.416,13.589) ; C6.1 28.804,4.064 28.956,3.912 v1(29.337,3.912) ; C10.1 v1(30.734,14.097) ; U2.4 34.531,3.906 34.531,4.94 v1(34.544,4.953)
  Top Layer 1 w0.203: R11.1 14.853,5.078 v1(15.238,5.463) 15.209,5.492 15.168,5.492 15.068,5.592 14.976,5.592 R10.1
  Top Layer 1 w0.254: v1(11.303,14.351) 11.303,13.95 11.476,13.777 U3.1 ; C4.1 C5.1 18.186,6.189 ccw(c18.728,6.189) A1.2@18.728,5.647
  other v1: 17.653,3.048 18.923,4.572 17.616,4.609 7.671,5.156 7.671,5.537 7.671,5.918 7.671,12.082 7.671,12.463 7.671,12.844
  other v2: 22.433,5.357 23.533,5.357 24.633,5.357 25.733,5.357 22.433,6.457 23.533,6.457 24.633,6.457 25.733,6.457 22.433,7.557 23.533,7.557 24.633,7.557 25.733,7.557 22.433,8.657 23.533,8.657 24.633,8.657 25.733,8.657
GPIO0_BOOT: P2.6 U1.5 | length 15.1
  Top Layer 1 w0.178: U1.5 21.329,8.007 21.577,8.255 v1(21.59,8.255)
  L4 w0.178: P2.6 13.97,14.859 14.478,14.351 19.078,14.351 20.574,12.855 20.574,9.271 v1(21.59,8.255)
GPIO1: P2.5 U1.6 | length 17.7
  Top Layer 1 w0.178: U1.6 21.402,7.607 21.542,7.747 v1(21.59,7.747)
  L4 w0.178: P2.5 11.43,15.113 12.522,14.021 19.013,14.021 20.295,12.74 20.295,9.03 v1@21.584,7.741
GPIO2: P2.4 U1.7 | length 20.5
  Top Layer 1 w0.178: U1.7 21.558,7.207 v1(21.59,7.239)
  L4 w0.178: P2.4 8.89,15.113 10.287,13.716 18.923,13.716 19.958,12.681 19.958,8.858 21.577,7.239 v1(21.59,7.239)
GPIO8: P1.4 U1.13 | length 13.3
  Top Layer 1 w0.178: v1(19.812,4.572) 20.047,4.807 U1.13
  L4 w0.178: P1.4 9.248,1.27 9.598,1.621 9.622,1.621 11.684,3.683 18.923,3.683 v1(19.812,4.572)
GPIO9: P1.5 U1.14 | length 10.8
  Top Layer 1 w0.178: v1(20.066,3.937) 20.066,4.303 20.17,4.407 U1.14
  L4 w0.178: P1.5 12.573,2.413 18.542,2.413 v1(20.066,3.937)
GPIO10: P1.6 U1.15 | length 8.9
  Top Layer 1 w0.178: P1.6 15.265,2.565 19.555,2.565 19.835,2.845 21.379,2.845 21.483,2.949 U1.15
GPIO11: P1.7 U1.16 | length 6.7
  Top Layer 1 w0.178: P1.7 17.526,2.286 19.671,2.286 19.95,2.565 21.494,2.565 21.883,2.954 U1.16
GPIO12: P1.8 U1.17 | length 4.6
  Top Layer 1 w0.178: P1.8 20.066,2.286 21.61,2.286 22.283,2.959 U1.17
GPIO13: P1.9 U1.18 | length 2.8
  Top Layer 1 w0.178: P1.9 21.831,1.511 21.831,2.111 22.683,2.964 U1.18
GPIO36: P2.14 U1.40 | length 12.9
  Top Layer 1 w0.178: U1.40 28.379,8.807 29.134,9.562 29.134,14.402 29.896,15.164 33.096,15.164 34.29,16.358 P2.14
GPIO37: P2.13 U1.41 | length 10.1
  Top Layer 1 w0.178: U1.41 28.384,9.207 28.854,9.677 28.854,14.518 29.78,15.443 30.683,15.443 P2.13
GPIO38: P2.12 U1.42 | length 8.1
  Top Layer 1 w0.178: U1.42 28.389,9.607 28.575,9.793 28.575,14.633 29.21,15.268 P2.12
GPIO45: P2.9 U1.50 | length 7.6
  Top Layer 1 w0.178: v1(23.876,11.176) 23.883,11.169 U1.50
  L4 w0.178: P2.9 21.59,12.573 22.86,11.303 23.701,11.303 23.828,11.176 v1(23.876,11.176)
GPIO46: P2.8 U1.55 | length 7.3
  Top Layer 1 w0.178: v1(21.59,11.303) 21.883,11.01 U1.55
  L4 w0.178: P2.8 19.05,14.774 20.853,12.971 20.853,12.04 v1(21.59,11.303)
LEDB: R13.1 U1.10 | length 7.5
  Top Layer 1 w0.203: R13.1 v1(15.494,6.731) ; U1.10 v1(21.327,6.007) ; v1@21.257,6.007 21.295,5.969 v1@21.336,5.969
  L4 w0.203: v1(15.494,6.731) 20.604,6.731 v1(21.327,6.007)
LEDG: R14.1 U1.9 | length 6.3
  Top Layer 1 w0.203: R14.1 v1(15.494,7.62) ; v1(19.05,7.112) 19.755,6.407 U1.9
  L4 w0.203: v1(15.494,7.62) 16.002,7.112 v1(19.05,7.112)
LEDR: R12.1 U1.8 | length 6.8
  Top Layer 1 w0.203: R12.1 v1(15.497,8.509) ; v1(19.685,7.366) 19.685,7.026 19.904,6.807 U1.8
  L4 w0.203: v1(15.497,8.509) 15.526,8.48 15.526,8.35 16.256,7.62 19.431,7.62 v1(19.685,7.366)
NetA1_1: A1.1 C15.2 L2.2 | length 2.8
  Top Layer 1 w0.216: A1.1 16.642,5.583 17.145,6.087 17.145,7.143 C15.2 L2.2
NetC9_2: C9.2 U1.53 Y1.3 | length 2.9
  Top Layer 1 w0.178: C9.2 22.475,12.167 Y1.3 22.669,10.752 22.683,10.738 U1.53
NetC11_1: C11.1 L1.1 U3.2 | length 5.9
  Top Layer 1 w0.254: U3.2 11.854,12.827 12.027,13 12.027,13.1 12.176,13.248 12.359,13.248 13.538,14.427 16.105,14.427 16.254,14.278 16.254,13.957 16.368,13.843 C11.1
NetC11_2: C11.2 U3.6 | length 1.3
  Top Layer 1 w0.254: U3.6 15.53,13.777 C11.2
NetC14_2: C14.2 L2.1 U1.2 | length 4.5
  Top Layer 1 w0.216: L2.1 C14.2 18.691,9.779 cw(c18.691,8.912) 19.304,9.525 ccw(c20.072,10.293) 20.072,9.207 U1.2
NetD1_K: D1.K R10.2 | length 1.4
  Top Layer 1 w0.203: D1.K R10.2
NetD2_K: D2.K R11.2 | length 1.4
  Top Layer 1 w0.203: D2.K R11.2
NetD3_BK: D3.BK R13.2 | length 3
  Top Layer 1 w0.203: D3.BK 11.612,7.585 12.1,7.585 12.954,6.731 R13.2
NetD3_GK: D3.GK R14.2 | length 1
  Top Layer 1 w0.203: D3.GK 14.045,7.678 R14.2
NetD3_RK: D3.RK R12.2 | length 1
  Top Layer 1 w0.203: D3.RK 14.034,8.578 R12.2
NetJ1_A5: J1.A5 R1.1 | length 2.2
  Top Layer 1 w0.178: J1.A5 6.326,10.287 R1.1
NetJ1_A6: J1.A6 J1.B6 R4.1 | length 4.3
  Top Layer 1 w0.102: J1.B6 7.234,8.25 v1(7.239,8.255) ; J1.A6 7.428,9.25 v1(7.451,9.227) ; v1@7.448,9.25 7.469,9.271 8.388,9.271 R4.1
  L4 w0.102: v1(7.239,8.255) 7.239,9.015 v1(7.451,9.227)
NetJ1_A7: J1.A7 J1.B7 R5.1 | length 4.7
  Top Layer 1 w0.102: J1.A7 8.256,8.75 8.316,8.69 8.316,8.683 8.49,8.509 R5.1 ; J1.B7 7.528,9.75 7.676,9.601 v1(7.714,9.601)
  L4 w0.102: v1(7.714,9.601) 7.714,9.575 7.874,9.415 v1(7.874,8.763)
NetJ1_B5: J1.B5 R2.1 | length 2.4
  Top Layer 1 w0.178: J1.B5 7.377,7.25 7.747,7.62 R2.1
NetR8_1: R8.1 R9.2 U3.4 | length 2.4
  Top Layer 1 w0.254: R8.1 R9.2 13.849,11.055 14.139,11.345 14.139,11.737 U3.4
RST_N: P2.7 R3.2 U1.56 | length 9.6
  Top Layer 1 w0.178: P2.7 16.51,16.253 17.145,15.618 17.145,13.693 17.503,13.335 19.304,13.335 19.812,12.827 19.812,12.302 19.916,12.198 R3.2 ; R3.2@20.447,12.223 20.447,11.76 20.959,11.248 20.967,11.248 21.483,10.732 U1.56
SPI_CIPO/DQ1: P1.14 U1.35 U2.2 | length 12.9
  Top Layer 1 w0.178: U1.35 31.547,6.807 32.004,6.35 32.004,5.055 ; U2.2 31.979,4.51 31.9,4.588 31.9,4.95 32.004,5.055 ; P1.14 34.29,1.628 33.909,2.009 33.909,4.648 33.503,5.055 32.004,5.055
SPI_CLK: P1.12 R7.2 U1.34 U2.6 | length 15.9
  Top Layer 1 w0.178: U1.34 27.487,6.403 27.966,6.403 28.019,6.35 v1(28.067,6.35) ; v1(30.861,7.874) 31.674,7.874 33.249,9.449 U2.6 33.249,12.681 R7.2
  L4 w0.178: P1.12 28.067,2.413 28.067,6.401 29.388,6.401 v1(30.861,7.874)
SPI_COPI/DQ0: P1.13 U1.36 U2.5 | length 16.1
  Top Layer 1 w0.178: U1.36 27.487,7.211 30.833,7.211 v1(30.861,7.239) 31.712,7.239 34.519,10.046 U2.5
  L4 w0.178: v1(30.861,7.239) 31.666,7.239 31.77,7.135 31.77,1.29 P1.13
SPI_CS: R6.2 U1.33 U2.1 | length 3.9
  Top Layer 1 w0.178: U1.33 27.814,6.007 27.923,5.897 28.328,5.897 28.576,5.65 28.595,5.65 28.88,5.365 R6.2 29.016,5.204 29.016,5.173 30.24,3.948 U2.1@30.503,3.948
SPI_HOLD/DQ3: U1.31 U2.7 | length 10.6
  Top Layer 1 w0.178: v1(26.543,4.966) 26.591,4.966 26.837,5.211 27.479,5.211 U1.31 ; U2.7 32.029,11.093 v1(32.029,9.068)
  L4 w0.178: v1(26.543,4.966) 26.543,5.461 27.915,6.833 29.228,6.833 30.824,8.429 31.391,8.429 v1(32.029,9.068)
SPI_WP/DQ2: U1.32 U2.3 | length 8.9
  Top Layer 1 w0.178: U1.32 28.099,5.607 28.302,5.404 28.302,4.853 28.406,4.749 29.023,4.749 29.812,3.96 29.812,2.982 30.102,2.692 32.944,2.692 33.249,2.997 U2.3
U0RXD: P2.10 U1.49 | length 6.3
  Top Layer 1 w0.178: U1.49 24.283,11.027 24.384,11.128 v1(24.384,11.176)
  L4 w0.178: P2.10 24.383,16.257 24.383,15.746 24.384,15.745 v1(24.384,11.176)
U0TXD: P2.11 U1.48 | length 7.2
  Top Layer 1 w0.178: U1.48 24.683,10.954 24.892,11.163 v1(24.892,11.176)
  L4 w0.178: v1(24.892,11.176) 24.892,15.24 25.909,16.257 26.417,16.257 P2.11
USB_N: R5.2 U1.25 | length 19.5
  Top Layer 1 w0.127: R5.2 9.29,8.509 9.452,8.671 9.452,8.752 9.526,8.826 9.743,8.826 ; v1(25.019,4.318) 25.072,4.318 25.444,3.946 25.449,3.946 25.483,3.912 U1.25
  L4 w0.127: v1(9.906,8.725) 9.968,8.725 10.095,8.852 19.092,8.852 22.171,5.772 24.835,5.772 25.019,5.588 25.064,5.543 25.064,4.822 25.153,4.732 25.153,4.507 25.019,4.372 v1(25.019,4.318)
USB_P: R4.2 U1.26 | length 19.8
  Top Layer 1 w0.127: R4.2 9.29,9.398 9.452,9.236 9.452,9.155 9.526,9.08 9.743,9.08 ; v1(25.542,4.333) 25.542,4.293 25.883,3.952 U1.26
  L4 w0.127: v1(9.906,9.182) 9.95,9.138 10.062,9.138 10.095,9.106 19.197,9.106 22.261,6.042 22.263,6.042 22.279,6.026 24.94,6.026 25.318,5.649 25.318,4.927 25.407,4.837 25.407,4.522 25.542,4.387 v1(25.542,4.333)
VBUS: C12.2 D2.A J1.A4 J1.A9 J1.B4 J1.B9 P1.2 P1.3 U3.3 U3.5 | length 1.2
  Top Layer 1 w0.178: v1(10.312,3.302) 10.312,3.308 10.5,3.495 10.5,3.526 10.911,3.937 D2.A
  Top Layer 1 w0.254: C12.2@15.392,12.827 15.519,12.7 C12.2
  other v1: 8.433,6.477 8.052,6.756 8.433,7.036 7.264,10.719 7.899,10.719 7.722,11.43 13.081,11.684 15.367,11.811 15.748,11.811
VDD_SPI: C10.2 U1.30 U2.8 | length 11
  Top Layer 1 w0.178: v1(26.741,4.514) 26.775,4.548 26.775,4.653 26.929,4.807 U1.30 ; v1(30.7,10.151) 30.7,10.199 30.734,10.234 C10.2
  PWR w0.178: v1(26.741,4.514) 26.775,4.548 26.775,4.677 27.534,5.436 27.534,7.214 27.953,7.633 27.953,7.773 30.309,10.129 30.677,10.129 v1(30.7,10.151)
pads on no net: J1.A8 J1.B8 U1.11 U1.12 U1.19 U1.21 U1.22 U1.29 U1.43 U1.44 U1.46 U1.47 U1.52

## Polygon pours and split planes (outlines as drawn)
+3V3 on PWR "+3V3_L03_P000" (solid, pour order 0): 0,0 35.56,0 35.56,17.78 0,17.78
GND on GND 1 "GND_L02_P002" (solid, pour order 2): 0,0 0,17.78 35.56,17.78 35.56,0
GND on L5 "GND_L05_P004" (solid, pour order 4): 0,17.78 0.064,17.716 0.064,0.064 35.496,0.064 35.56,0 35.56,17.78
VBUS on L5 "VBUS_L05_P003" (solid, pour order 3): 0.127,0 0,0.127 0,13.716 16.764,13.716 17.018,13.462 17.018,11.176 11.811,5.969 11.811,0
GND on Top Layer 1 "GND_L01_P012" (hatched 90Degree grid 0.305 track 0.203, pour order 12): 15.748,4.572 17.526,4.572 ccw(c17.526,4.699) 17.653,4.699 17.653,6.223 cw(c18.034,6.223) 18.034,6.604 19.558,6.604 cw(c19.558,6.407) 19.755,6.407 19.755,2.765 cw(c19.695,2.765) 19.695,2.705 cw(c19.53,2.705) 19.53,2.54 16.256,2.54 cw(c16.256,3.175) 15.621,3.175 15.621,4.445 cw(c15.748,4.445)
NetC11_1 on Top Layer 1 "NETC11_1_L01_P011" (solid, pour order 11): 12.167,12.192 12.446,12.471 12.446,13.259 12.344,13.36 11.1,13.36 10.846,13.614 10.846,13.894 8.433,13.894 8.382,13.843 8.382,12.649 8.839,12.192
VBUS on Top Layer 1 "VBUS_L01_P010" (solid, pour order 10): 5.715,11.752 7.865,11.76 7.95,11.675 7.95,11.074 8.153,10.871 8.153,10.49 7.163,10.49 6.985,10.668 6.985,10.947 6.883,11.049 5.715,11.049
GND on Top Layer 1 "GND_L01_P009" (solid, pour order 9): 5.715,11.752 5.715,12.945 5.842,13.072 7.849,13.072 7.95,12.971 7.95,11.828 7.874,11.752
GND on Top Layer 1 "GND_L01_P008" (solid, pour order 8): 5.715,6.248 5.715,5.055 5.842,4.928 7.849,4.928 7.95,5.029 7.95,6.172 7.874,6.248
VBUS on Top Layer 1 "VBUS_L01_P007" (solid, pour order 7): 5.715,6.985 7.62,6.985 7.899,7.264 8.585,7.264 8.661,7.188 8.661,6.325 8.585,6.248 5.715,6.248
+3V3 on Top Layer 1 "+3V3_L01_P006" (solid, pour order 6): 8.382,12.192 10.795,12.192 10.795,11.557 11.049,11.303 12.192,11.303 12.573,10.922 12.573,8.255 12.446,8.255 12.319,8.255 10.922,8.255 10.922,9.525 9.525,10.922 8.382,10.922 8.128,11.176 8.128,12.065
VBUS on Top Layer 1 "VBUS_L01_P005" (solid, pour order 5): 12.827,12.573 12.827,12.192 11.049,12.192 11.049,11.43 13.589,11.43 13.589,12.319 14.952,12.319 15.113,12.065 15.113,11.684 15.24,11.557 16.002,11.557 16.002,12.446 16.002,13.081 15.748,13.335 13.589,13.335
CH4_D on Bottom Layer 1 "CH4_D_L06_P013" (solid, pour order 13): 27.686,8.255 26.416,9.525 23.114,9.525 22.86,9.779 22.86,10.668 22.479,11.049 21.336,11.049 21.082,10.795 21.082,6.858 22.098,5.842 27.559,5.842 27.686,5.969
GND on Bottom Layer 1 "GND_L06_P014" (solid, pour order 14): 35.56,0 35.56,17.78 0,17.78 0,0

## Keep-outs
Keep-Out Layer:
  lines w0.2: -0.1,1.27 ccw(c1.27,1.27) 1.27,-0.1 ; -0.1,1.27 -0.1,4.375 ; -0.1,1.27 -0.1,1.27 ; -0.1,1.27 -0.1,1.27 ; -0.1,4.375 cw(c0,4.375) 0,4.475 ; -0.1,4.375 cw(c0,4.375) 0,4.475 ; -0.1,13.65 ccw(c0,13.65) -0.071,13.579 ; -0.1,13.65 ccw(c0,13.65) -0.071,13.579 ; -0.1,13.65 -0.1,16.51 ; -0.1,16.51 cw(c1.27,16.51) 1.269,17.88 ; -0.1,16.51 -0.1,16.51 ; -0.071,13.579 -0.046,13.554 ; -0.046,13.554 ccw(c0.025,13.625) 0.025,13.525 ; -0.046,13.554 ccw(c0.025,13.625) 0.025,13.525 ; 0,4.475 5.488,4.475 5.488,13.525 0.025,13.525 ; 1.269,17.88 cw(c1.27,17.78) 1.27,17.88 ; 1.269,17.88 cw(c1.27,16.51) 1.27,17.88 ; 1.27,-0.1 34.29,-0.1 ccw(c34.29,1.27) 35.66,1.269 ; 1.27,-0.1 1.27,-0.1 ; 1.27,-0.1 1.27,-0.1 ; 1.27,17.88 ccw(c1.27,17.78) 1.27,17.88 ; 1.27,17.88 34.29,17.88 ; 34.29,17.88 cw(c34.29,17.78) 34.291,17.88 ; 34.29,17.88 cw(c34.29,16.51) 34.291,17.88 ; 34.291,17.88 cw(c34.29,16.51) 35.66,16.511 ; 35.66,1.269 ccw(c35.56,1.27) 35.66,1.27 ; 35.66,1.269 ccw(c34.29,1.27) 35.66,1.27 ; 35.66,1.27 ccw(c35.56,1.27) 35.66,1.27 ; 35.66,1.27 35.66,16.51 ; 35.66,16.51 ccw(c34.29,16.51) 35.66,16.511 ; 35.66,16.51 ccw(c35.56,16.51) 35.66,16.511 ; 35.66,16.51 ccw(c35.56,16.51) 35.66,16.51

## Silkscreen, mask and mechanical layers (free items; w line width, h text height)
Top Overlay:
  region: 0,15.24 2.54,15.24 2.54,17.78 0,17.78
  region: 0,0 2.54,0 2.54,2.54 0,2.54
  lines w0.254: 7.112,2.032 8.509,3.429 ; 7.302,15.811 7.874,15.24 ; 14.922,15.811 15.494,15.24 ; 17.462,15.811 18.034,15.24 ; 25.082,15.811 25.654,15.24 ; 27.622,15.811 28.194,15.24
  text "3V3" at 6.9,14.196 h1.02
  text "BOOT" at 14.52,14.196 h1.02
  text "RST" at 17.06,14.196 h1.02
  text "RXD" at 24.68,14.196 h1.02
  text "TXD" at 27.22,14.196 h1.02
Bottom Overlay:
  text "Ketan Desai / 2020" at 22.504,13.081 h1.52
  text "ESP32-S2-Ink  / v1.0" at 22.504,5.334 h1.52
  text "4" at 27.279,4.064 h1.52
  text "3" at 29.819,4.064 h1.52
  text "2" at 32.359,4.064 h1.52
  text "1" at 34.899,4.064 h1.52
Bottom Solder:
  drawing of 5 lines, arcs and shapes, not listed
Drill Guide:
  lines w0.2: -0.1,1.27 ccw(c1.27,1.27) 1.27,-0.1 ; -0.1,1.27 -0.1,4.375 ; -0.1,1.27 -0.1,1.27 ; -0.1,1.27 -0.1,1.27 ; -0.1,4.375 cw(c0,4.375) 0,4.475 ; -0.1,4.375 cw(c0,4.375) 0,4.475 ; -0.1,13.65 ccw(c0,13.65) -0.071,13.579 ; -0.1,13.65 ccw(c0,13.65) -0.071,13.579 ; -0.1,13.65 -0.1,16.51 ; -0.1,16.51 cw(c1.27,16.51) 1.269,17.88 ; -0.1,16.51 -0.1,16.51 ; -0.071,13.579 -0.046,13.554 ; -0.046,13.554 ccw(c0.025,13.625) 0.025,13.525 ; -0.046,13.554 ccw(c0.025,13.625) 0.025,13.525 ; 0,4.475 5.488,4.475 5.488,13.525 0.025,13.525 ; 1.269,17.88 cw(c1.27,17.78) 1.27,17.88 ; 1.269,17.88 cw(c1.27,16.51) 1.27,17.88 ; 1.27,-0.1 34.29,-0.1 ccw(c34.29,1.27) 35.66,1.269 ; 1.27,-0.1 1.27,-0.1 ; 1.27,-0.1 1.27,-0.1 ; 1.27,17.88 ccw(c1.27,17.78) 1.27,17.88 ; 1.27,17.88 34.29,17.88 ; 34.29,17.88 cw(c34.29,17.78) 34.291,17.88 ; 34.29,17.88 cw(c34.29,16.51) 34.291,17.88 ; 34.291,17.88 cw(c34.29,16.51) 35.66,16.511 ; 35.66,1.269 ccw(c35.56,1.27) 35.66,1.27 ; 35.66,1.269 ccw(c34.29,1.27) 35.66,1.27 ; 35.66,1.27 ccw(c35.56,1.27) 35.66,1.27 ; 35.66,1.27 35.66,16.51 ; 35.66,16.51 ccw(c34.29,16.51) 35.66,16.511 ; 35.66,16.51 ccw(c35.56,16.51) 35.66,16.511 ; 35.66,16.51 ccw(c35.56,16.51) 35.66,16.51